# Altium PCB PCB1.PcbDoc
Units mil, origin at the board's own origin, x right, y up, seen from the top; angles counter-clockwise.
Board outline 1183.46 x 1927.95 mil, 2 copper layers (Top Layer, Bottom Layer); 13 components, 11 nets, 53 pads, 21 vias.
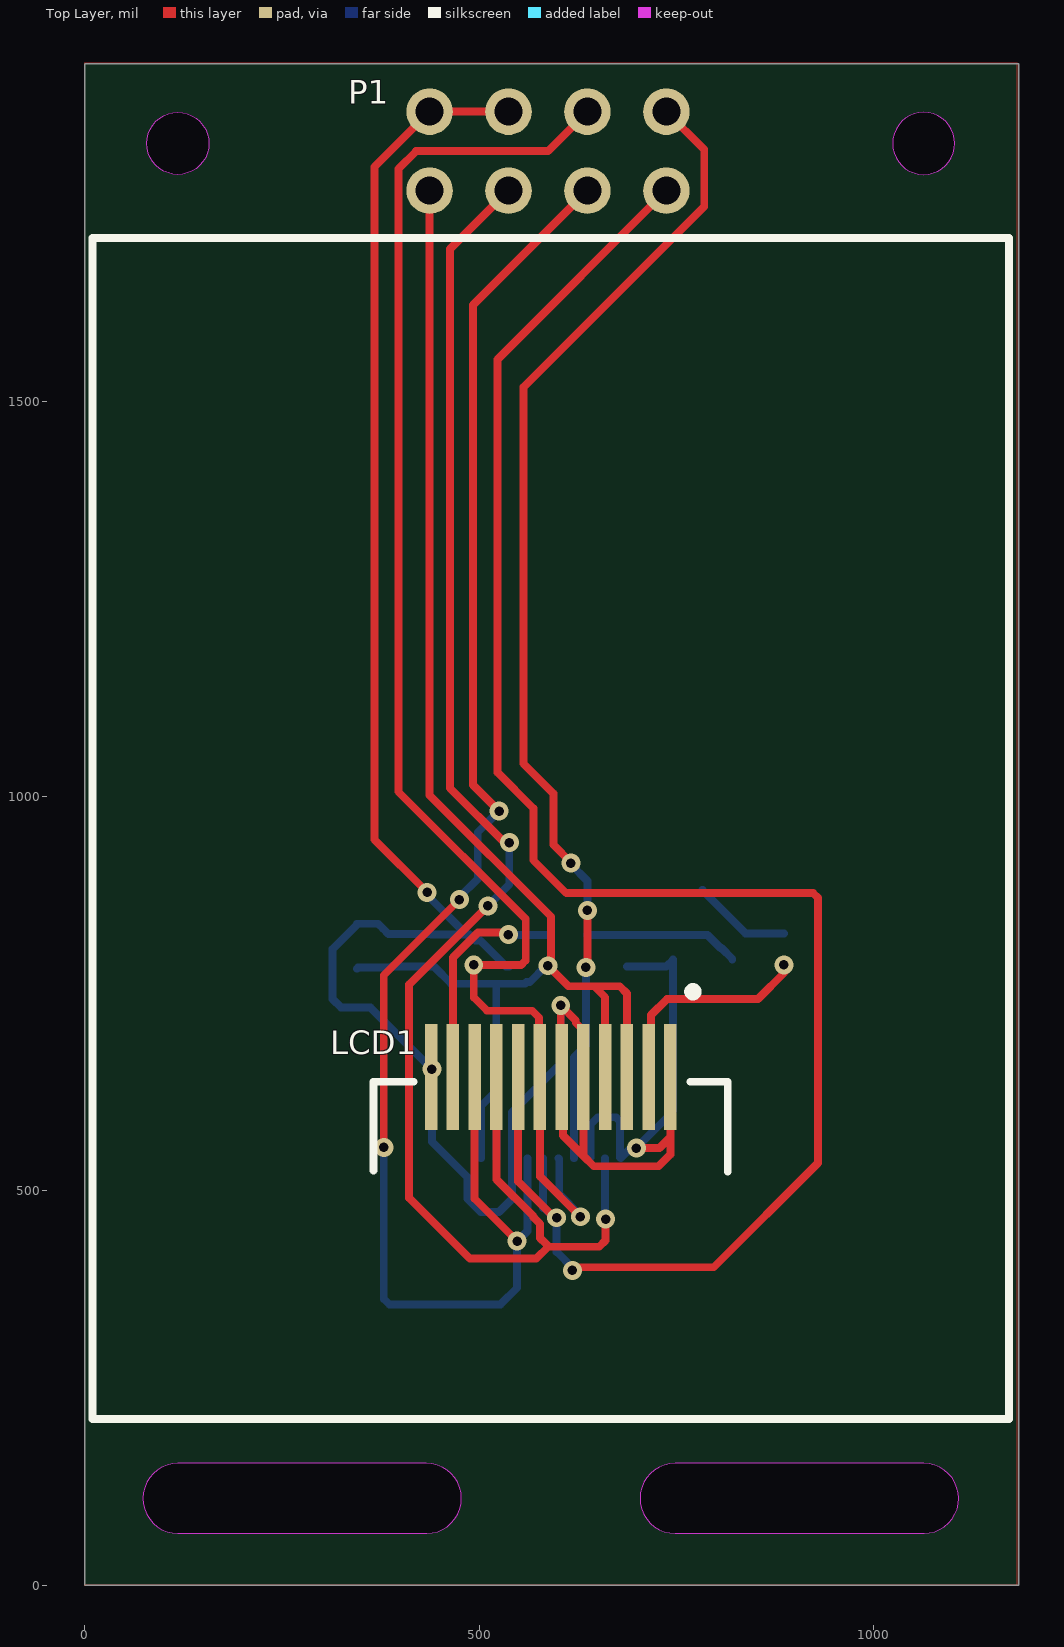
[diagram p0: Top Layer view]
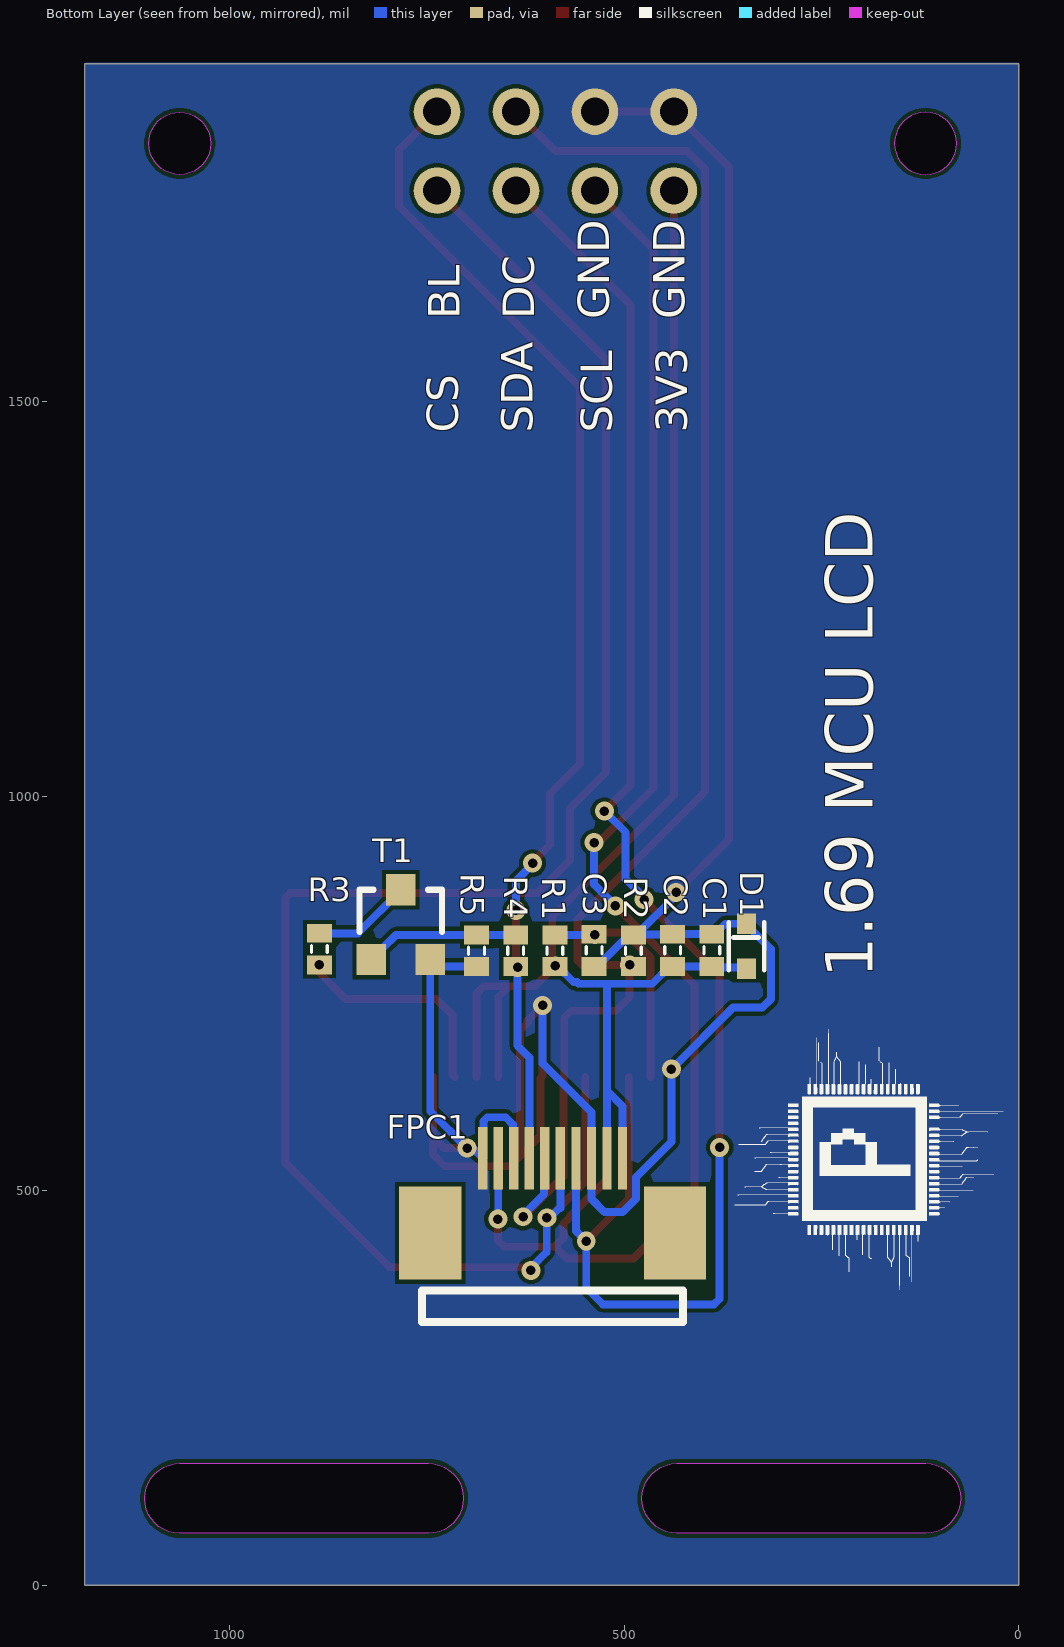
[diagram p1: Bottom Layer view, seen from below]
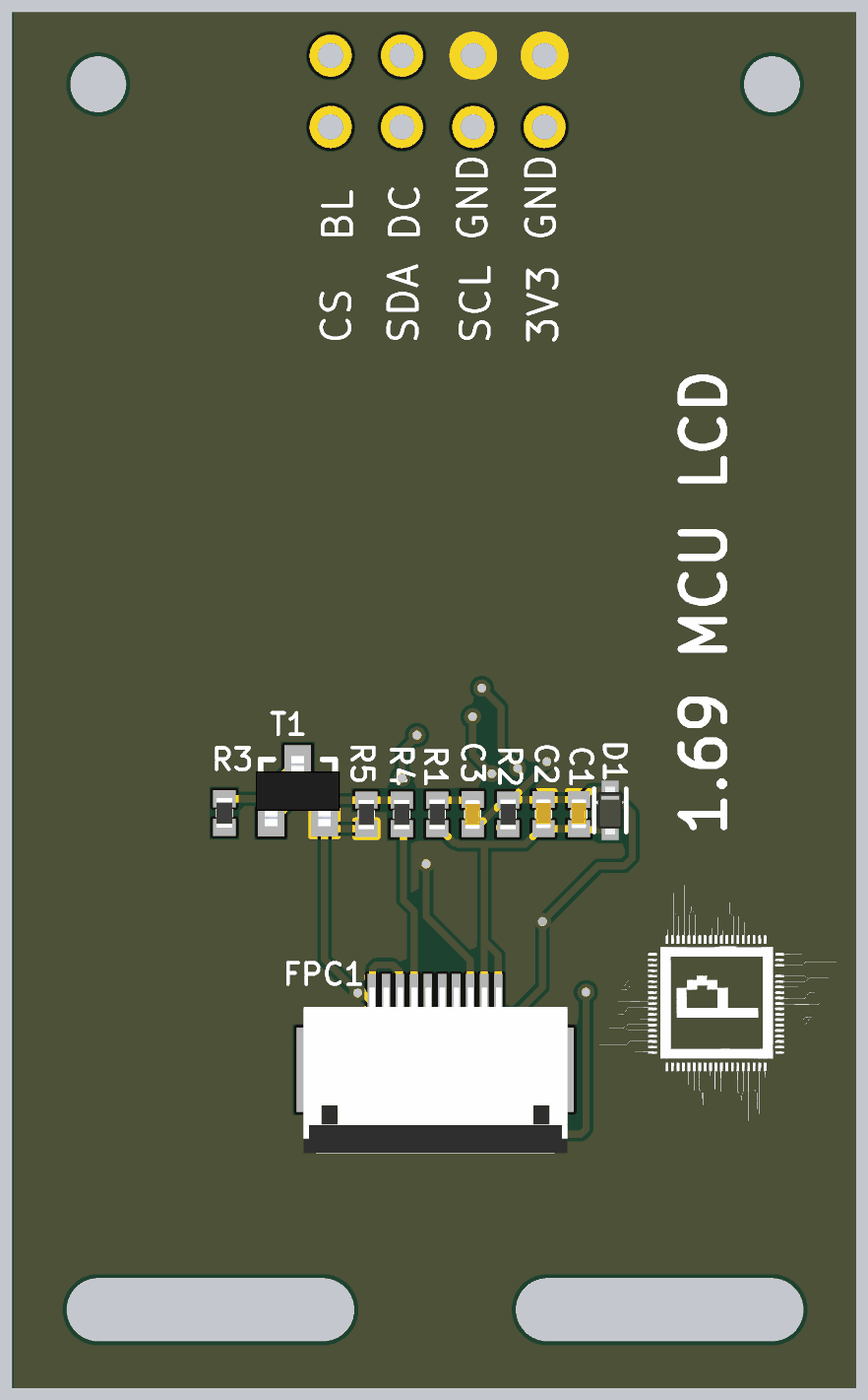
[diagram p2: 3D render of the assembled board from below, using the file's embedded part models]

## Layer stack, top to bottom
Top Solder: solder mask 0.4, Solder Resist, Dk 3.5
Top Layer: signal copper 1.4
Dielectric 1: dielectric 12.6, FR-4, Dk 4.8
Bottom Layer: signal copper 1.4
Bottom Solder: solder mask 0.4, Solder Resist, Dk 3.5

## Board outline
0,0 0,1927.95 1183.46,1927.95 1183.46,0
cut-out: 703.65,110.24 ccw(c748.03,110.24) 748.03,65.85 1062.99,65.85 ccw(c1062.99,70.87) 1063.42,65.87 ccw(c1062.98,110.25) 1107.36,110.25 ccw(c1062.98,110.25) 1062.98,154.64 ccw(c1062.98,110.25) 1061.79,154.62 748.03,154.62 ccw(c748.03,110.24)
cut-out: 73.73,110.24 ccw(c118.11,110.24) 118.11,65.85 433.07,65.85 ccw(c433.07,70.87) 433.5,65.87 ccw(c433.06,110.25) 477.44,110.25 ccw(c433.06,110.25) 433.06,154.64 ccw(c433.06,110.25) 431.87,154.62 118.11,154.62 ccw(c118.11,110.24)
cut-out: 1023.62,1826.77 ccw(c1062.99,1826.77) 1062.99,1787.4 ccw(c1062.99,1826.77) 1102.36,1826.77 ccw(c1062.99,1826.77) 1062.99,1866.14 ccw(c1062.99,1826.77)
cut-out: 118.11,1787.4 cw(c118.11,1826.77) 78.74,1826.77 cw(c118.11,1826.77) 118.11,1866.14 cw(c118.11,1826.77) 157.48,1826.77 cw(c118.11,1826.77)

## Design rules (kind name [scope] priority, off if disabled: settings)
Clearance [All] p1: gap=5 ignorepadtopadclearanceinfootprint=FALSE
PlaneClearance [All] p1: clearance=7
PlaneConnect [All] p1: planeconnectstyle=Direct reliefexpansion=20 reliefentries=4 reliefconductorwidth=10 reliefairgap=10
PolygonConnect [All] p1: connectstyle=Direct reliefconductorwidth=10 reliefentries=4 polygonreliefangle="90 Angle" airgapwidth=10
RoutingVias [All] p1: holewidth=12 width=24 viastyle="Through Hole" minholewidth=12 minwidth=24 maxholewidth=12 maxwidth=24
SolderMaskExpansion [All] p1: expansion=4 istentingtop=FALSE
Width [All] p1: maxlimit=10 minlimit=5 preferedwidth=5 minimp=50.000000 maximp=50.000000 favimp=50.000000
28 further rules are at their usual default settings.

## Components (designator, comment, footprint, x,y, rotation, side; value= is the part's Value field where it differs from the comment)
C1 "0.1uF" 0402-CAP 388.93,805 r270 bottom
C2 "10uF" 0402-CAP 438.61,805 r270 bottom
C3 "0.1uF" 0402-CAP 537.96,804 r90 bottom
D1 "ESD5Z3V3/丝印ZE" SOD523 345,809.69 r270 bottom
FPC1 "FPC插座10P，翻盖下接，0.5mm间距" FPC10P-0.5MM 590.55,493.74 r180 bottom locked
LCD1 "1.69寸IPS240*280" 1.69寸IPS240*280 590.59,644.07 r0 top locked
P1 "Header 4X2" HDR2X4 437,1767 r0 top locked
R1 "10K" 0402-RES 587.64,804 r270 bottom
R2 "10K" 0402-RES 488.28,804 r270 bottom
R3 "5.1R" 0402-res 886,806 r270 bottom
R4 "1k" 0402-res 637.32,804 r90 bottom
R5 "1k" 0402-res 687,804 r90 bottom
T1 "8050" SO-G3/C2.25 783,837 r180 bottom

## Footprints (in the part's own frame and the unit in brackets; to place one, negate y for a bottom-side part, rotate by r counter-clockwise, add the part's x,y. Pads: shape width x height; smd on the part's side, far side on the other; paste and mask are expansions set on the pad)
1.69寸IPS240*280 [mm]
  rect 0.4x3.4 smd: 1(3.85,0) 2(3.15,0) 3(2.45,0) 4(1.75,0) 5(1.05,0) 6(0.35,0) 7(-0.35,0) 8(-1.05,0) 9(-1.75,0) 10(-2.45,0) 11(-3.15,0) 12(-3.85,0)
  silkscreen extent -5.71,-3.04 5.69,2.87
0402-CAP [mm]
  rect 0.6x0.8 smd: 1(-0.508,0) 2(0.533,0)
  silkscreen extent -0.1,-0.25 0.13,0.25, body extent -0.53,-0.28 0.53,0.28, height 0.5
0402-RES [mm]
  rect 0.6x0.8 smd: 1(-0.508,0) 2(0.508,0)
  silkscreen extent -0.12,-0.25 0.11,0.25, body extent -0.53,-0.27 0.52,0.28, height 0.5
0402-res [mm]
  rect 0.6x0.8 smd: 1(-0.508,0) 2(0.508,0)
  silkscreen extent -0.12,-0.25 0.11,0.25, body extent -0.53,-0.27 0.52,0.28, height 0.5
FPC10P-0.5MM [mm]
  rect 2x3 smd: 0(-3.936,-1.202) 0(3.936,-1.202)
  rect 0.3x2 smd: 1(2.25,1.202) 2(1.75,1.202) 3(1.25,1.202) 4(0.75,1.202) 5(0.25,1.202) 6(-0.25,1.202) 7(-0.75,1.202) 8(-1.25,1.202) 9(-1.75,1.202) 10(-2.25,1.202)
  silkscreen extent -4.2,-4.07 4.2,-3.05, body extent -4.69,-4.17 4.71,1.73, height 2.1
HDR2X4 [mm]
  round 1.5 hole 0.9: 1(0,0) 2(0,2.54) 3(2.54,0) 4(2.54,2.54) 5(5.08,0) 6(5.08,2.54) 7(7.62,0) 8(7.62,2.54)
SO-G3/C2.25 [mm]
  rect 0.95x1 smd: 1(0.95,-1.125) 2(-0.95,-1.125) 3(0,1.125)
  silkscreen extent -1.33,-0.22 1.32,1.13, body extent -1.5,-1.26 1.5,1.24, height 1.11
SOD523 [mil]
  rect 26x23.62 smd paste+0 mask+0: 1(28.5,0) 2(-28.5,0)
  silkscreen extent -31,-23 31,23, body extent -34,-17 34,17, height 28

## Part data
C1 C2 C3: library part Cap1
D1: library part TVS
FPC1: library part LCD-SPI
P1: "Header, 4-Pin, Dual row"
R1 R2: library part Res
R3 R4 R5: library part Res1

## Via types
v1: diameter 24, hole 12, Top Layer to Bottom Layer, tented both sides, 21 vias

## Nets (pads, with @x,y where several pads share a name; then routed paths per layer and width w, separated by ;. In a path a pad name is that pad's centre, name@x,y a point inside that pad or via, vN(x,y) a via of type N, cw(c..) or ccw(c..) an arc to the next point about the centre after c; other vN are vias at no path point)
3.3V: C1.2 C2.2 D1.1 FPC1.1 FPC1.2 LCD1.3 LCD1.4 P1.1 R1.2 | length 1965.2
  Top Layer w10: P1.1 437,1001 591,847 591,789 v1(587,785) 613,759 645.5,759 ; LCD1.4 659.49,745.01 645.5,759 ; LCD1.3 687.05,749.95 678,759 645.5,759
  Bottom Layer w10: D1.1 346.41,782.59 387.52,782.59 C1.2 C2.2 442.54,784 464.35,762.19 521.5,762.19 ; FPC1.1 501.99,606.99 521.5,626.5 ; FPC1.2 521.67,626.33 521.5,626.5 ; R1.2 583.7,784 563.87,764.17 559.83,764.17 557.85,762.19 521.5,762.19 ; 521.5,626.5 521.5,762.19
GND: C1.1 C2.1 C3.1 D1.2 FPC1.3 FPC1.8 FPC1.10 LCD1.1 LCD1.5 LCD1.6 LCD1.12 P1.2 P1.4 R2.1 R5.1 T1.1 | length 3388.2
  Top Layer w10: v1(434,878) 367,945 367,1797 P1.2 P1.4 ; v1(699,554) 728.17,554 742.17,568 ; LCD1.1 742.17,568 ; 631.93,544.07 606.16,569.84 606.16,642.28 LCD1.6 603.19,645.26 v1(603.19,734.81) 622.24,715.76 622.24,712.81 631.93,703.13 LCD1.5 631.93,544.07 ; 631.93,544.07 645,531 727.14,531 742.17,546.02 742.17,568
  Bottom Layer w10: v1(434,878) 434,874.35 R2.1@483.85,824.5 ; C3.1 534.03,784 500.84,817.19 495.1,817.19 R2.1 ; v1(603.19,734.81) 603.19,661.19 541.36,599.36 FPC1.3 541.36,489.36 525,473 501.86,473 485,489.86 485,517 440,562 v1(440,654) 362,732 325,732 314,743 314,806 345,837 D1.2 371.81,838.19 378.18,831.82 384.99,825 C1.1 C2.1 439.11,824.5 R2.1@483.85,824.5 ; FPC1.8 640.69,541.99 640.69,583.69 650,593 673.29,593 678.25,588.05 678.25,541.99 FPC1.10 692.07,554 v1(699,554) 745.6,600.6 T1.1 736.89,784 R5.1 ; R2.1@483.85,824.5 484.35,824 R2.1 ; R2.1@483.85,824.5 487.78,824.5 R2.1
LCD_BL: FPC1.7 P1.8 R4.1 | length 1486.8
  Top Layer w10: v1(616,915) 616,916.26 594,938.26 594,1003 556,1041 556,1518 785,1747 785,1819 P1.8 ; v1(635,783) 637,785 v1(637,855)
  Bottom Layer w10: v1(616,915) 616,913.46 637,892.46 v1(637,855) ; FPC1.7 620.1,668.87 635,683.77 635,782.38 633.38,784 R4.1
LCD_DC: FPC1.6 LCD1.7 P1.6 R2.2 | length 1906.7
  Top Layer w10: v1(628,467) 576.81,518.19 LCD1.7 575.86,645.02 575.86,719.14 567,728 510,728 493,745 v1(493,786) 509,786 553.05,786 558.91,791.86 558.91,844.09 397.47,1005.53 397.47,1794.47 420,1817 587,1817 P1.6
  Bottom Layer w10: R2.2 490.28,786 v1(493,786) ; FPC1.6 601.32,540.18 601.32,495.68 628,469 v1(628,467)
NetC3_2: C3.2 LCD1.11 R1.1 | length 286.4
  Top Layer w10: LCD1.11 466.57,795.36 498.21,827 534.41,827 v1(536.91,824.5)
  Bottom Layer w10: v1(536.91,824.5) 537.46,824.5 C3.2 C3.2@538.46,824.5 ; C3.2@538.96,824 R1.1
NetLCD1_2: LCD1.2 R3.2 | length 281
  Top Layer w10: LCD1.2 717.48,646.94 717.48,722.48 738,743 853,743 886.86,776.86 886.86,785.14 v1(886,786)
NetR3_1: R3.1 T1.3 | length 126.5
  Bottom Layer w10: T1.3 783,880.31 837.31,826 R3.1
NetR4_2: R4.2 R5.2 T1.2 | length 196.6
  Bottom Layer w10: R4.2 R5.2 789.11,824 805.72,807.39 806.7,807.39 820.4,793.69 T1.2
SPI_CS: FPC1.5 LCD1.8 P1.7 | length 2399.8
  Top Layer w10: LCD1.8 549.25,511.75 595.3,465.7 v1(597.95,465.7) ; v1(618,399) 619,399 623,403 797,403 929,535 929,871.14 923.14,877 610.29,877 568.5,918.79 568.5,984.5 523,1030 523,1553 P1.7
  Bottom Layer w10: FPC1.5 580.73,478.27 581.59,478.27 594.16,465.7 v1(597.95,465.7) 597.95,422.49 618,402.45 v1(618,399)
SPI_SCL: FPC1.9 LCD1.9 P1.3 | length 2031.1
  Top Layer w10: v1(510.94,860.94) 411,761 411,491 488,414 572.21,414 587.21,429 588,429 ; LCD1.9 521.69,514.31 568.82,467.18 568.82,466.18 577,458 577,440 585,432 588,429 ; P1.3 463,1693 463,1010 532,941 v1(538,941) ; v1(660,464) 660,437 652,429 588,429
  Bottom Layer w10: v1(510.94,860.94) 538,888 v1(538,941) ; FPC1.9 659.47,464.53 v1(660,464)
SPI_SDA: FPC1.4 LCD1.10 P1.5 | length 2118.7
  Top Layer w10: v1(379,555) 379,773 v1(474.7,868.7) ; LCD1.10 494.13,489.87 v1(548,436) ; v1(525,981) 492,1014 492,1622 P1.5
  Bottom Layer w10: v1(379,555) 379,363 386,356 527,356 548,377 v1(548,436) 561.04,449.04 FPC1.4 ; v1(474.7,868.7) 474.7,871.7 498,895 498,954 v1(525,981)
pads on no net: FPC1.0

## Polygon pours and split planes (outlines as drawn)
no net on Top Layer "NONET_L01_P001" (solid, remove dead copper, pour order 1): 0,1929.13 1181.1,1929.13 1181.1,0 0,0
GND on Bottom Layer "GND_L02_P000" (solid, remove dead copper, pour order 0): 0,1929.13 1181.1,1929.13 1181.1,0 0,0

## Other copper
Top Layer:
  pour cut-out: 367,1797 367,945 434,878 580.54,878 616,913.46 556,973.46 556,1518 492,1582 492,1669.97 473.2,1688.78

## Silkscreen, mask and mechanical layers (free items; w line width, h text height)
Top Overlay:
  lines w10: 10,211 1171.1,211 1171.1,1707.06 10,1707.06 10,211
Bottom Overlay:
  drawing of 85 lines, arcs and shapes, not listed
  text "GND" at 423,1604 h40 r270
  text "GND" at 519,1604 h40 r270
  text "DC" at 614,1604 h40 r270
  text "BL" at 708,1604 h40 r270
  text "3V3" at 420,1460 h40 r270
  text "SCL" at 515,1460 h40 r270
  text "SDA" at 616,1460 h40 r270
  text "CS" at 710,1460 h40 r270
  text "1.69 MCU LCD" at 185,769 h60 r270
Mechanical 1:
  circle w10: c1062.99,1826.77 r39.37
  circle w10: c118.11,1826.77 r39.37
  lines w10: 0,0 1181.1,0 1181.1,1929.13 0,1929.13 0,0 ; 118.11,70.87 cw(c118.11,110.24) 118.11,149.61 433.07,149.61 cw(c433.07,110.24) 433.07,70.87 118.11,70.87 ; 748.03,70.87 cw(c748.03,110.24) 748.03,149.61 1062.99,149.61 cw(c1062.99,110.24) 1062.99,70.87 748.03,70.87